# Altium PCB BLMC-26.PcbDoc (part 1 of 2)
Units mm, origin at the board's own origin, x right, y up, seen from the top; angles counter-clockwise.
Board outline 139.57 x 72.14 mm, 4 copper layers (Top Layer, GND, POWER, Bottom Layer), stack 0.603 mm thick; 168 components, 104 nets, 514 pads, 115 vias.
Unrouted connection lines stored in the file: 49.
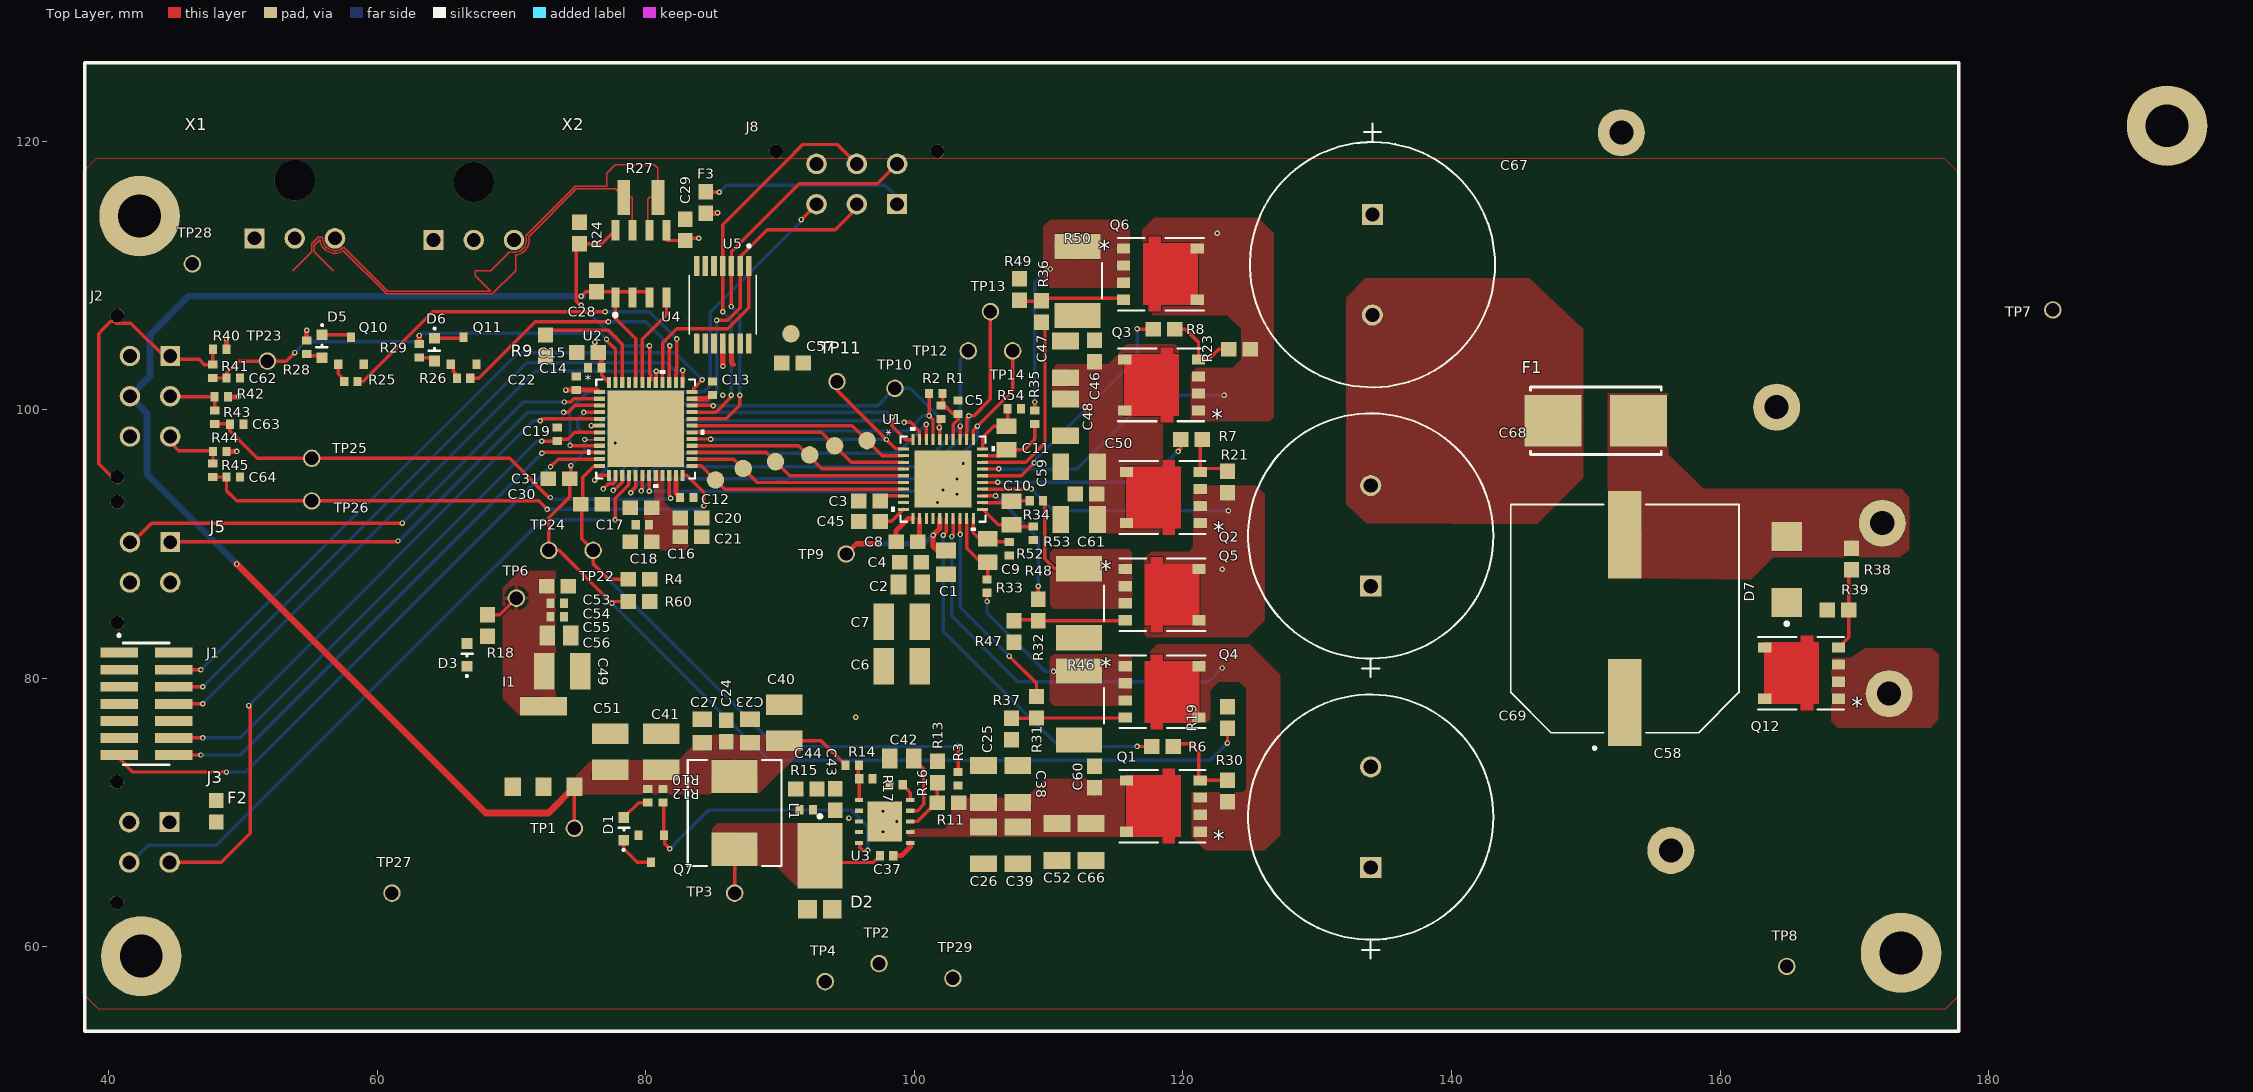
[diagram p0: Top Layer view]
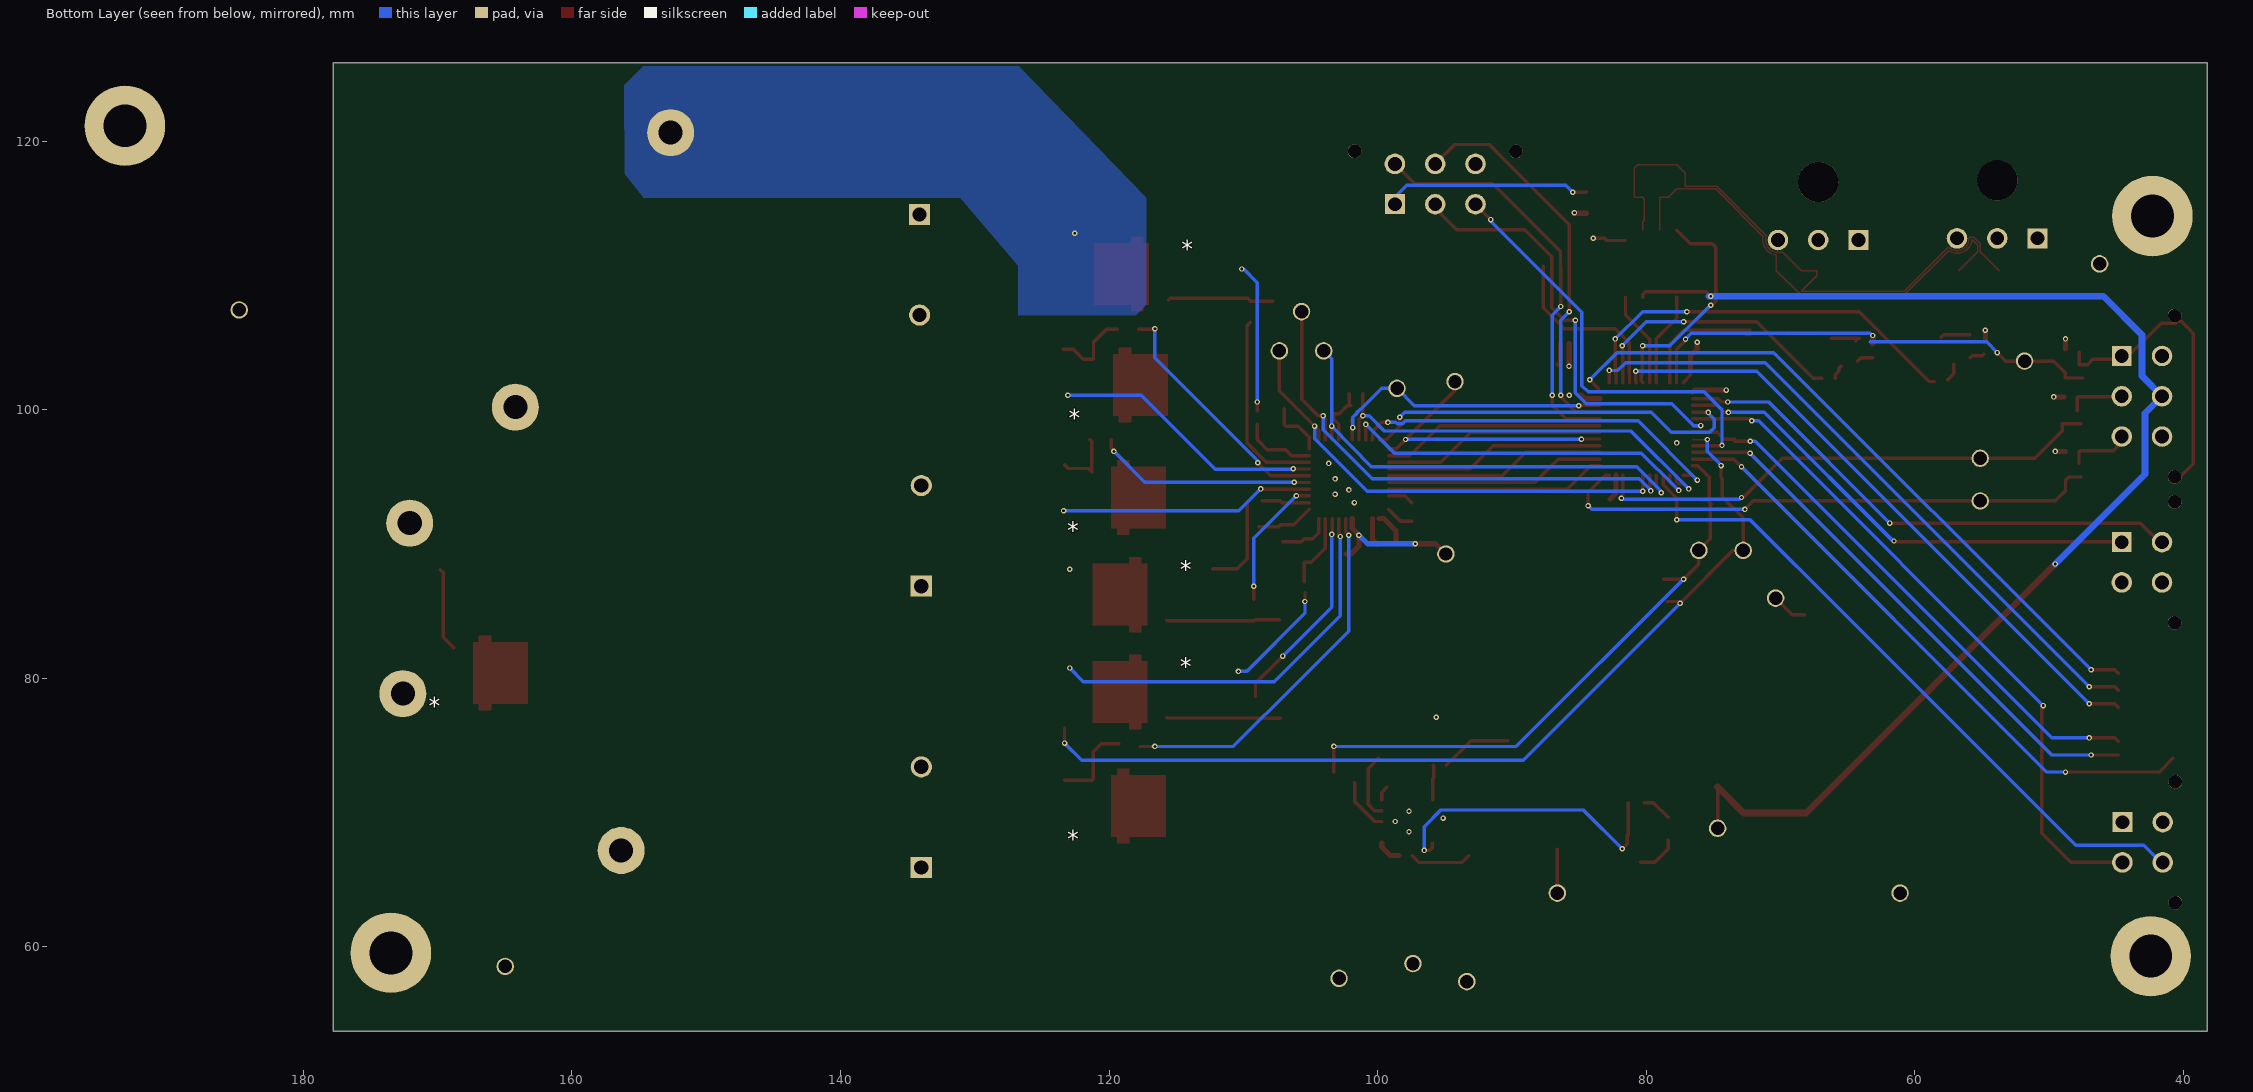
[diagram p1: Bottom Layer view, seen from below]
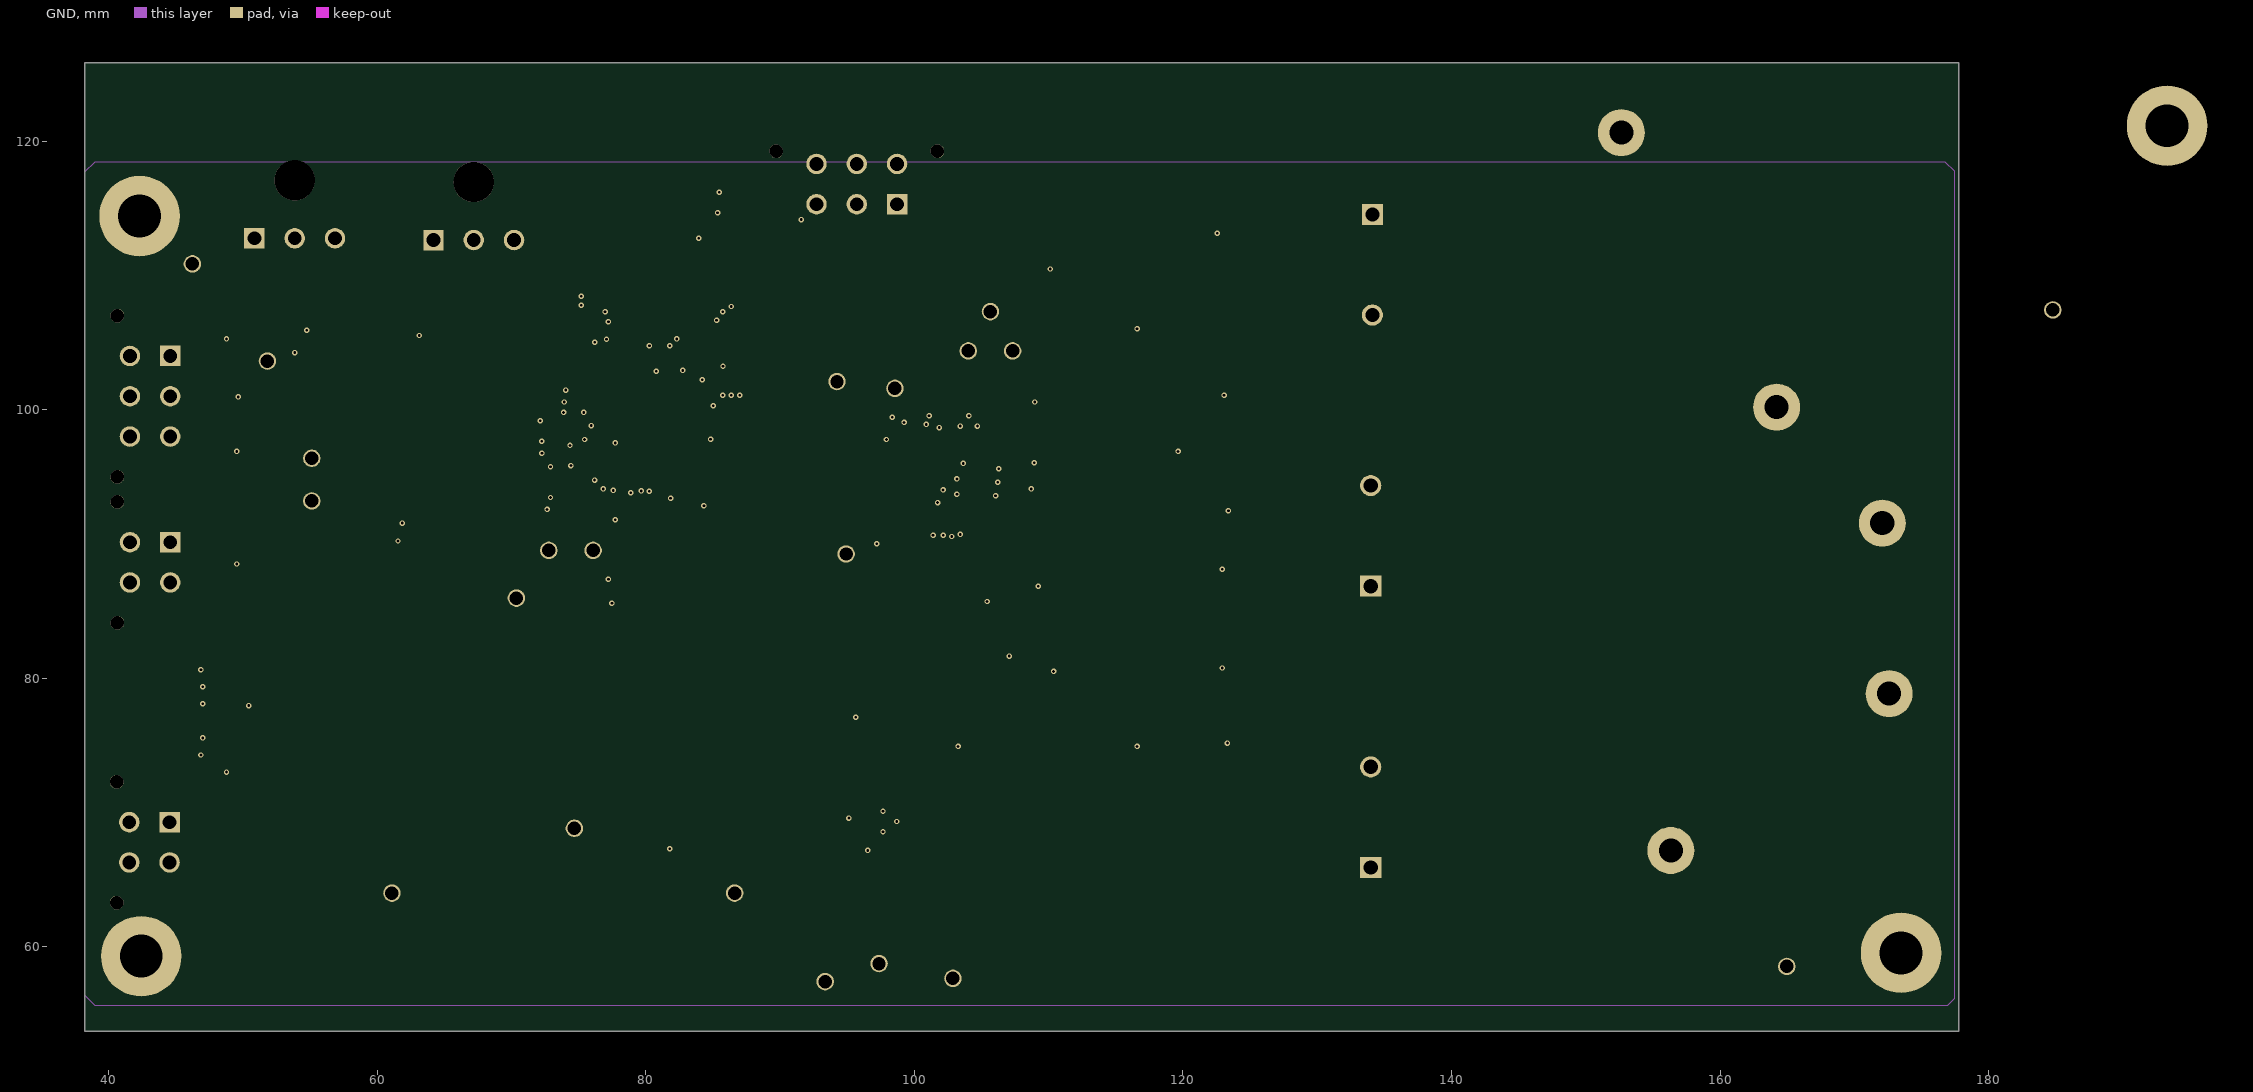
[diagram p2: GND]
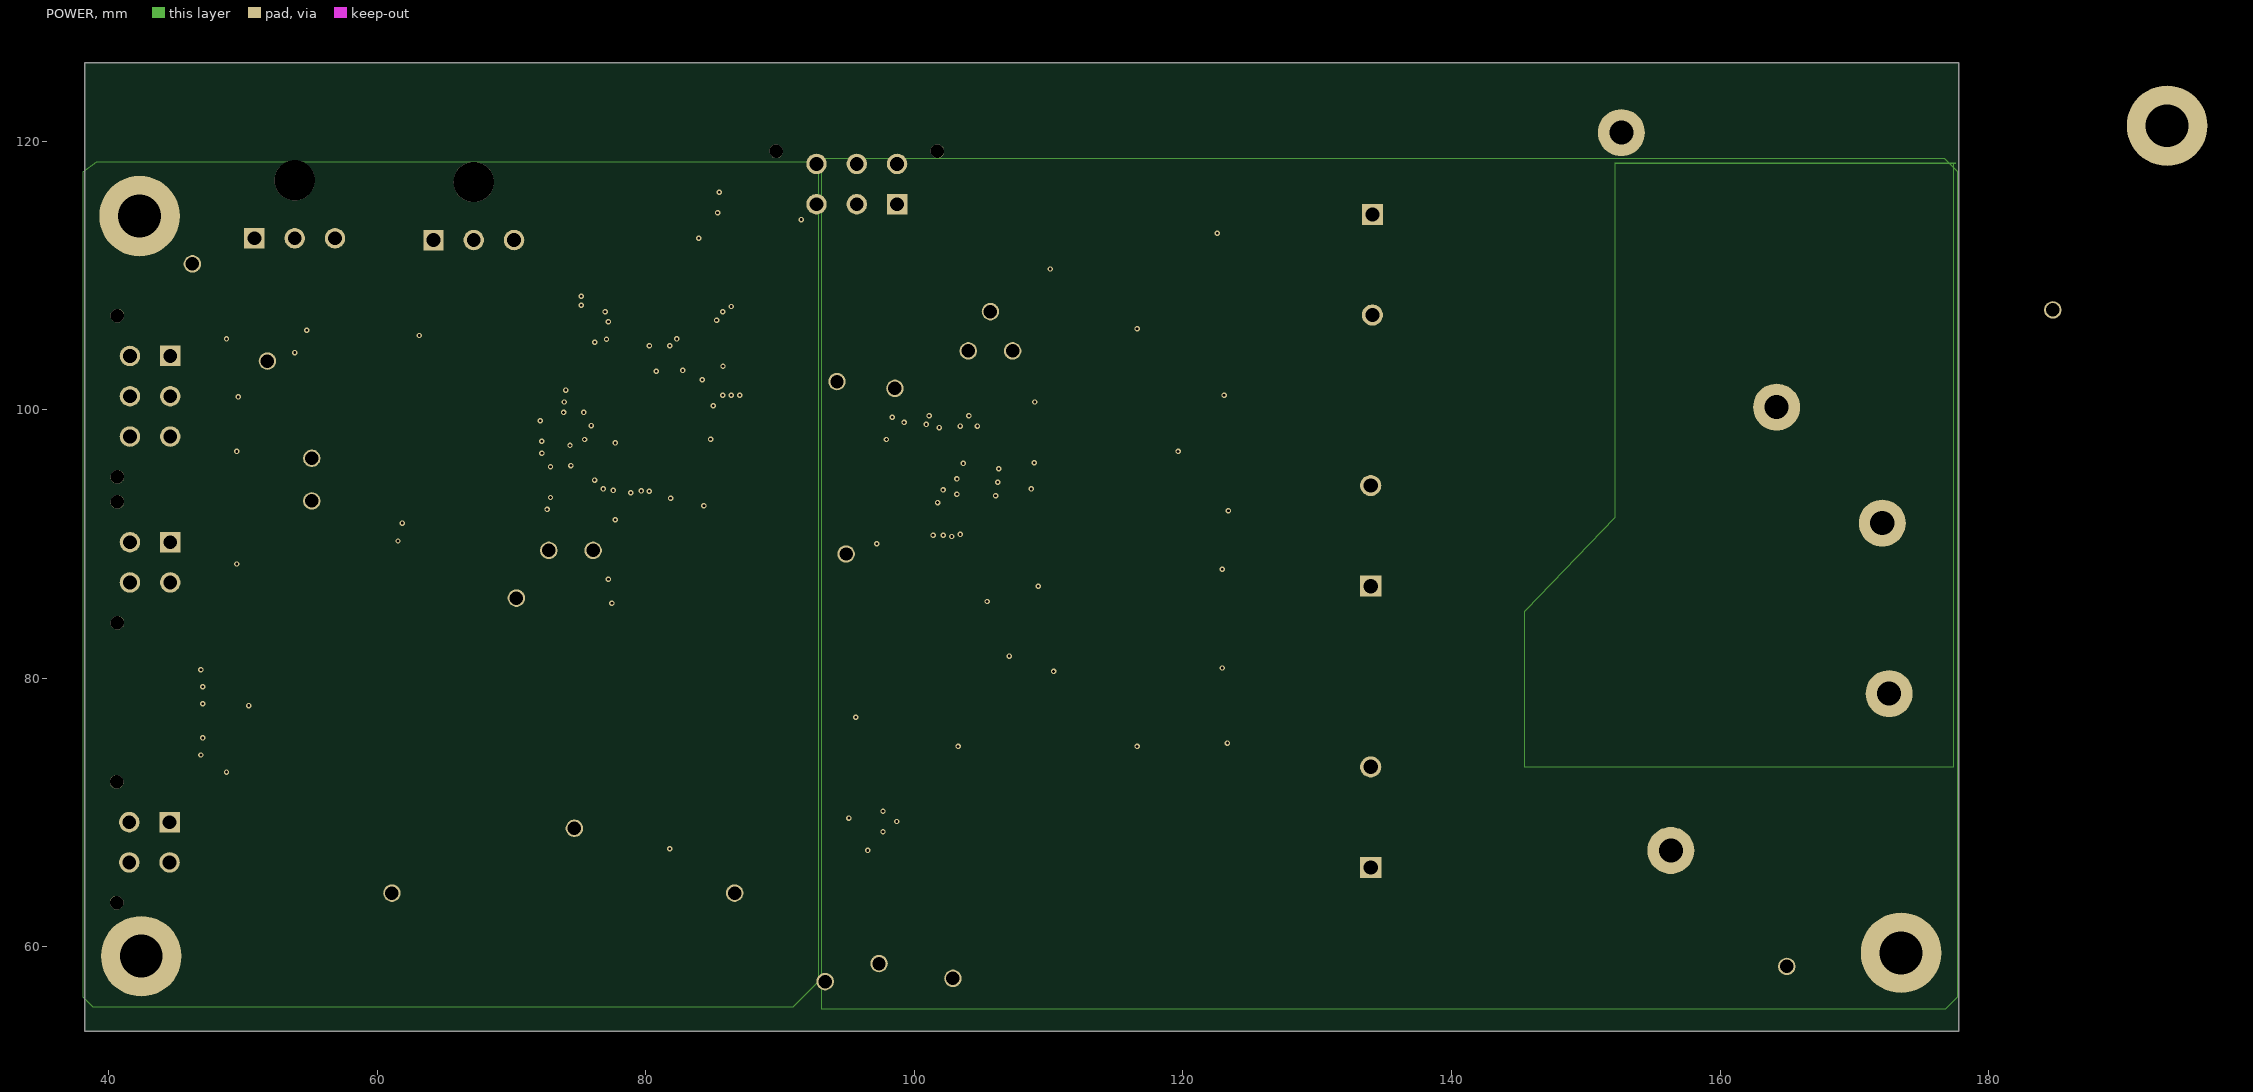
[diagram p3: POWER]

## Layer stack, top to bottom
Top Solder: solder mask 0.0102, Solder Resist, Dk 3.5
Top Layer: signal copper 0.0356
Dielectric 1: prepreg 0.0711, PP-006, Dk 4.1
GND: signal copper 0.035
Dielectric 2: dielectric 0.32, FR-4, Dk 4.8
POWER: signal copper 0.035
Dielectric 3: prepreg 0.0711, PP-006, Dk 4.1
Bottom Layer: signal copper 0.0356
Bottom Solder: solder mask 0.0102, Solder Resist, Dk 3.5

## Board outline
38.204,53.721 38.204,125.857 177.777,125.857 177.777,53.721

## Design rules (kind name [scope] priority, off if disabled: settings)
BoardOutlineClearance [All] p1: gap=0.2 ignorepadtopadclearanceinfootprint=FALSE
Clearance "Stitching GND" [IsStitchingVia and InNet('GND') vs (IsVia and (Not IsStitchingVia)) Or IsPad] p1: gap=0.127 ignorepadtopadclearanceinfootprint=FALSE
Clearance [All] p2: gap=0.102 ignorepadtopadclearanceinfootprint=FALSE except(0.127: Arc-Via Track-Via SMDPad-Via THPad-Via Via-Via Via-Fill Via-Poly Via-Region Via-Text; 0.25: Arc-Hole Track-Hole SMDPad-Hole THPad-Hole Via-Hole Fill-Hole Poly-Hole Region-Hole Text-Hole)
ComponentClearance [All] p1: gap=0.102 collisioncheckmode=3 verticalgap=0.102 showdistances=TRUE
DiffPairsRouting [All] p1: maxlimit=0.102 minlimit=0.102 mostfreqgap=0.102 toplayer_minwidth=0.102 toplayer_maxwidth=1816.048 toplayer_prefwidth=0.102 midlayer1_minwidth=0.102 midlayer1_maxwidth=1816.048 midlayer1_prefwidth=0.102 midlayer2_minwidth=0.102 midlayer2_maxwidth=1816.048 midlayer2_prefwidth=0.102 bottomlayer_minwidth=0.102 bottomlayer_maxwidth=1816.048 bottomlayer_prefwidth=0.102 maxuncoupledlength=12.7
DiffPairsRouting USB [OnLayer('Top Layer') And InDifferentialPairClass('USB')] p2: maxlimit=0.127 minlimit=0.127 mostfreqgap=0.127 toplayer_maxgap=0.127 toplayer_prefgap=0.127 toplayer_minwidth=0.237 toplayer_maxwidth=0.237 toplayer_prefwidth=0.237 midlayer1_mingap=0.127 midlayer1_minwidth=0.089 midlayer1_maxwidth=0.089 midlayer1_prefwidth=0.089 midlayer2_mingap=0.127 midlayer2_minwidth=0.089 midlayer2_maxwidth=0.089 midlayer2_prefwidth=0.089 bottomlayer_maxgap=0.127 bottomlayer_prefgap=0.127 bottomlayer_minwidth=0.237 bottomlayer_maxwidth=0.237 bottomlayer_prefwidth=0.237 impedanceprofiledriven=TRUE impedanceprofileid={C8994B27-2D6B-4B4B-A1C4-DCAF0529D0FB} maxuncoupledlength=12.7
Height [All] p1: minheight=0 maxheight=1816.048 prefheight=12.7
HoleSize [All] p1: absolutevalues=TRUE maxlimit=6.3 minlimit=0.2 maxpercent=80.000 minpercent=20.000
HoleToHoleClearance [All] p1: gap=0.25 allowstackedmicrovias=FALSE
MinimumAnnularRing [All] p1: minimumring=0.076
MinimumSolderMaskSliver [All] p1: minsoldermaskwidth=0
PlaneClearance [All] p1: clearance=0.102
PlaneConnect PlaneConnectPowerPads [InPadClass('PowerPads')] p1: planeconnectstyle=Direct reliefexpansion=0.508 reliefentries=4 reliefconductorwidth=0.254 reliefairgap=0.254
PlaneConnect [All] p2: planeconnectstyle=Direct reliefexpansion=0.3 reliefentries=4 reliefconductorwidth=0.102 reliefairgap=0.102
PolygonConnect PolygonConnectPowerPads [All vs (InPadClass('PowerPads'))] p1: connectstyle=Direct reliefconductorwidth=0.254 reliefentries=4 polygonreliefangle="90 Angle" airgapwidth=0.254
PolygonConnect [InNet('MOTOR_C')] p2: connectstyle=Direct reliefconductorwidth=0.102 reliefentries=4 polygonreliefangle="90 Angle" airgapwidth=0.102
RoutingVias [All] p1: holewidth=0.305 width=0.605 viastyle="Through Hole" minholewidth=0.3 minwidth=0.6 maxholewidth=0.405 maxwidth=0.705
SilkToSilkClearance [All] p1: silktosilkclearance=0
SilkToSolderMaskClearance [IsPad] p1: minsilkscreentomaskgap=0.102 clearancetoexposedcopper=TRUE
SolderMaskExpansion [All] p1: expansion=0.075 istentingtop=FALSE
SupplyNets "Schematic Supply Nets_3" [InNet('GND')] p1: voltage=0.000
Width [All] p1: maxlimit=0.508 minlimit=0.102 preferedwidth=0.254 minimp=50.000000 maximp=50.000000 favimp=50.000000
20 further rules are at their usual default settings.

## Classes and differential pairs
component class Driver: C1 C2 C3 C4 C5 C6 C7 C8 C45 C46 C47 C48 C50 C52 C59 C60 C61 C66 R1 R2 TP9 TP10 TP11 TP12 TP13 TP14 U1
component class MCU: C12 C13 C14 C15 C16 C17 C18 C19 C20 C21 C22 J1 R9 TP22 TP23 TP24 TP25 TP26 U2
component class LDOs: C49 C51 C53 C54 C55 C56 D3 I1 R18 TP6 TP7 TP8 TP27 TP28 TP29
component class Encoder: C57 U5
component class FETs: 2 C9 C10 C11 C31 C67 C68 C69 Q1 Q2 Q3 Q4 Q5 Q6 R6 R7 R8 R19 R21 R23 R30 R31 R32 R33 R34 R35 R36 R37 R46 R47 R48 R49 R50 R52 R53 R54 R60
component class Connectors: C30 C58 C62 C63 C64 D7 F2 F3 J2 J3 J5 J8 Q12 R3 R4 R38 R39 R40 R41 R42 R43 R44 R45
component class CAN: C28 C29 D5 D6 Q10 Q11 R25 R26 R27 R28 R29 U4 X1 X2
component class 5V_Buck: C23 C24 C25 C26 C27 C37 C38 C39 C40 C41 C42 C43 C44 D1 D2 F1 L1 Q7 R10 R11 R12 R13 R14 R15 R16 R17 TP1 TP2 TP3 TP4 U3
differential pair CAN: +CAN_P -CAN_N

## Components (designator, comment, footprint, x,y, rotation, side; value= is the part's Value field where it differs from the comment)
C1 "08051C105K4Z2A" CAP-0805 102.362,88.646 r270 top
C2 "08051C105K4Z2A" CAP-0805 99.695,86.995 r180 top
C3 "CC0603KRX7R7BB105" CAP-0603 96.647,93.218 r0 top
C4 "GRM188R72A104KA35D" CAP-0603 99.695,88.646 r180 top
C5 "CC0402KRX7R7BB104" CAP-0402 103.251,100.203 r270 top
C6 "GRM32EC72A106KE05L" CAP-1210 99.06,80.899 r180 top
C7 "GRM32EC72A106KE05L" CAP-1210 99.06,84.201 r180 top
C8 "C0603C473K1RACTU" CAP-0603 99.441,90.17 r180 top
C9 "GRM2165C1H272JA01D" CAP-0805 105.455,89.528 r90 top
C10 "GRM2165C1H272JA01D" CAP-0805 107.233,92.313 r270 top
C11 "GRM2165C1H272JA01D" CAP-0805 106.852,97.91 r90 top
C12 "CC0402KRX7R7BB104" CAP-0402 83.058,93.472 r180 top
C13 "CC0402KRX7R7BB104" CAP-0402 84.963,101.6 r270 top
C14 "CC0402KRX7R7BB104" CAP-0402 76.2,103.124 r0 top
C15 "CC0603KRX5R8BB475" CAP-0603 75.654,104.267 r0 top
C16 "CC0603KPX7R9BB103" CAP-0603 79.629,92.71 r0 top
C17 "CC0402KRX7R7BB104" CAP-0402 79.748,91.44 r0 top
C18 "CC0603KRX7R7BB105" CAP-0603 79.629,90.17 r0 top
C19 "CC0402KRX7R7BB104" CAP-0402 73.406,98.171 r270 top
C20 "CC0603KPX7R9BB103" CAP-0603 83.35,91.948 r180 top
C21 "CC0603KRX7R7BB105" CAP-0603 83.35,90.551 r180 top
C22 "CC0402KRX7R7BB104" CAP-0402 74.803,101.981 r270 top
C23 "08051C105K4Z2A" CAP-0805 87.757,76.073 r90 top
C24 "GRM188R72A104KA35D" CAP-0603 85.979,76.073 r90 top
C25 "CC1206KKX7R0BB225" CAP-1206 105.156,72.136 r90 top
C26 "CC1206KKX7R0BB225" CAP-1206 105.156,67.564 r270 top
C27 "08051C105K4Z2A" CAP-0805 84.201,76.073 r90 top
C28 "GRM188R72A104KA35D" CAP-0603 76.327,109.601 r90 top
C29 "GRM188R72A104KA35D" CAP-0603 82.931,113.411 r90 top
C30 "GRM188R72A104KA35D" CAP-0603 75.946,92.964 r0 top
C31 "GRM188R72A104KA35D" CAP-0603 73.533,94.869 r180 top
C37 "CC0402KRX7R7BB104" CAP-0402 97.925,66.802 r180 top
C38 "CC1206KKX7R0BB225" CAP-1206 107.696,72.136 r270 top
C39 "CC1206KKX7R0BB225" CAP-1206 107.696,67.564 r90 top
C40 "GRM32ER61C476KE15L" CAP-1210 90.297,76.708 r90 top
C41 "GRM32ER61C476KE15L" CAP-1210 81.153,74.549 r90 top
C42 "GRM2165C1H272JA01D" CAP-0805 99.06,74.041 r0 top
C43 "CC0603CRNPO0BN6R8" CAP-0603 94.107,70.993 r270 top
C44 "GRM1885C1H302JA01D" CAP-0603 91.948,71.755 r0 top
C45 "UMK107AB7105KA-T" CAP-0603 96.647,91.694 r180 top
C46 "GRM188R72A104KA35D" CAP-0603 113.411,104.394 r90 top
C47 "CC1206KKX7R0BB225" CAP-1206 111.252,103.759 r90 top
C48 "CC1206KKX7R0BB225" CAP-1206 111.252,99.441 r270 top
C49 "293D106X9016A2TE3" CAP-1210 73.787,80.518 r180 top
C50 "CC1206KKX7R0BB225" CAP-1206 112.268,95.758 r180 top
C51 "CL32B106KBJNNNE" CAP-1210 77.343,74.549 r90 top
C52 "CC1206KKX7R0BB225" CAP-1206 110.617,67.818 r270 top
C53 "CC0603KRX5R6BB106" CAP-0603 73.406,86.868 r180 top
C54 "CC0402KRX7R7BB104" CAP-0402 73.406,85.598 r180 top
C55 "CC0402KRX7R7BB104" CAP-0402 73.414,84.582 r180 top
C56 "CC0805JRNPO9BN471" CAP-0805 73.533,83.185 r180 top
C57 "CC0603KRX7R7BB105" CAP-0603 90.921,103.489 r180 top
C58 "EEETK2A101AM" CAP-100U-0001 152.908,84.455 r90 top
C59 "GRM188R72A104KA35D" CAP-0603 112.776,93.726 r180 top
C60 "GRM188R72A104KA35D" CAP-0603 113.411,72.644 r90 top
C61 "CC1206KKX7R0BB225" CAP-1206 112.268,91.821 r180 top
C62 "CC0402JRX7R9BB392" CAP-0402 49.276,102.37 r0 top
C63 "CC0402JRX7R9BB392" CAP-0402 49.53,98.933 r0 top
C64 "CC0402JRX7R9BB392" CAP-0402 49.276,94.996 r0 top
C66 "CC1206KKX7R0BB225" CAP-1206 113.157,67.818 r270 top
C67 "ESH477M100AM2AA" CAP-470U-0001 134.112,114.554 r270 top
C68 "ESH477M100AM2AA" CAP-470U-0001 133.985,86.868 r90 top
C69 "ESH477M100AM2AA" CAP-470U-0001 133.985,65.918 r90 top
D1 "BL-HKC36G-AV-TRB" LED-0603 79.11,67.356 r90 top
D2 "SDT8A100P5-7" DO-POWERDI5 92.964,65.659 r90 top
D3 "BL-HKC36G-AV-TRB" LED-0603 67.426,80.31 r90 top
D5 "BL-HKC36G-AV-TRB" LED-0603 55.129,106.177 r270 top
D6 "BL-HKC36G-AV-TRB" LED-0603 63.511,105.923 r270 top
D7 "SMBJ40CA" "DO-214AA (SMBJ)" 164.973,88.138 r270 top
F1 "01550900M" FUSE-0001 150.749,99.187 r180 top
F2 "0467.250NRHF" RES-0603 48.006,70.104 r270 top
F3 "0467.250NRHF" RES-0603 84.455,115.443 r90 top
I1 "LM1117IMPX-3.3/NOPB" IC-SOT-223-4 72.39,74.93 r90 top
J1 "FTSH-107-01-L-DV-K-A" SAMTEC_FTSH-107-01-L-DV-K 42.799,78.105 r270 top
J2 "Molex 43045-0612" CONN-6POS-0001 44.577,101.013 r90 top
J3 "Molex 43045-0412" CONN-4POS-0002 44.529,67.794 r90 top
J5 "Molex 43045-0412" CONN-4POS-0002 44.577,88.646 r90 top
J8 "Molex 43045-0612" CONN-6POS-0001 95.71,115.316 r0 top
L1 "IHLP2525CZER8R2M01" IND25X25CZ 86.614,69.977 r90 top
Q1 "NTMFS6H800NT1G" DFN6_5X6_SO8FL_488AA_ONS 118.49,70.485 r180 top
Q2 "NTMFS6H800NT1G" DFN6_5X6_SO8FL_488AA_ONS 118.49,93.472 r180 top
Q3 "NTMFS6H800NT1G" DFN6_5X6_SO8FL_488AA_ONS 118.363,101.854 r180 top
Q4 "NTMFS6H800NT1G" DFN6_5X6_SO8FL_488AA_ONS 118.491,78.994 r0 top
Q5 "NTMFS6H800NT1G" DFN6_5X6_SO8FL_488AA_ONS 118.491,86.233 r0 top
Q6 "NTMFS6H800NT1G" DFN6_5X6_SO8FL_488AA_ONS 118.364,110.109 r0 top
Q7 "T2N7002AK,LM" IC-SOT23-3 80.391,67.31 r180 top
Q10 "T2N7002AK,LM" IC-SOT23-3 58.039,104.394 r0 top
Q11 "T2N7002AK,LM" IC-SOT23-3 66.421,104.394 r0 top
Q12 "NTMFS6H800NT1G" DFN6_5X6_SO8FL_488AA_ONS 166.022,80.391 r180 top
R1 "RC0402FR-0710KL" RES-0402 101.6,101.219 r0 top
R2 "RC0402FR-0710KL" RES-0402 101.981,99.822 r90 top
R3 "RC0402FR-0782K5L" RES-0402 103.251,72.517 r270 top
R4 "RC0603FR-074K7L" RES-0603 79.502,87.376 r180 top
R6 "RMCF0603FT4R70" RES-0603 118.491,74.93 r180 top
R7 "RMCF0603FT4R70" RES-0603 120.65,97.79 r180 top
R8 "RMCF0603FT4R70" RES-0603 118.599,105.998 r180 top
R9 "RMCF0603ZT0R00" RES-0603 72.517,104.775 r90 top
R10 "RC0402FR-07165RL" RES-0402 80.137,71.247 r270 top
R11 "RC0603FR-072M15L" RES-0603 102.489,70.739 r0 top
R12 "RC0402FR-071KL" RES-0402 81.28,71.247 r90 top
R13 "RC0603FR-07100KL" RES-0603 101.727,73.025 r270 top
R14 "RC0402FR-0780K6L" RES-0402 95.377,73.533 r0 top
R15 "RC0402FR-0736K5L" RES-0402 91.948,70.231 r0 top
R16 "RTT021783FTH" RES-0402 98.633,72.085 r0 top
R17 "AC0402FR-0715K4L" RES-0402 96.393,72.517 r0 top
R18 "AC0603FR-10100RL" RES-0603 68.199,83.947 r270 top
R19 "NCU18XH103F60RB" RES-0603 123.317,77.089 r90 top
R21 "RC0603FR-0745K3L" RES-0603 123.317,94.615 r270 top
R23 "RC0603FR-0745K3L" RES-0603 124.206,104.521 r0 top
R24 "RC0603FR-074K7L" RES-0603 75.057,113.157 r90 top
R25 "RC0402FR-07470RL" RES-0402 58.039,102.108 r0 top
R26 "RC0402FR-07470RL" RES-0402 66.421,102.362 r0 top
R27 "RC1210FR-07120RL" RES-1210 79.629,115.824 r0 top
R28 "RC0402FR-07100RL" RES-0402 54.737,104.648 r90 top
R29 "RC0402FR-07100RL" RES-0402 63.119,104.394 r90 top
R30 "RC0603FR-0745K3L" RES-0603 123.317,71.628 r270 top
R31 "RMCF0603FT4R70" RES-0603 109.093,77.851 r90 top
R32 "RMCF0603FT4R70" RES-0603 109.22,85.09 r90 top
R33 "RC0402FR-07100RL" RES-0402 105.41,86.876 r270 top
R34 "RC0402FR-07100RL" RES-0402 109.093,93.218 r0 top
R35 "RC0402FR-07100RL" RES-0402 108.966,99.441 r90 top
R36 "RMCF0603FT4R70" RES-0603 109.474,107.315 r270 top
R37 "RC0603FR-0745K3L" RES-0603 107.233,76.239 r270 top
R38 "RC0603FR-07200KL" RES-0603 169.799,88.9 r270 top
R39 "RC0603FR-07100KL" RES-0603 168.783,85.09 r180 top
R40 "RC0402FR-072KP" RES-0402 48.26,104.521 r0 top
R41 "RC0402FR-0710KL" RES-0402 47.752,102.87 r270 top
R42 "RC0402FR-072KP" RES-0402 48.387,100.965 r0 top
R43 "RC0402FR-0710KL" RES-0402 47.879,99.441 r270 top
R44 "RC0402FR-072KP" RES-0402 48.26,96.901 r0 top
R45 "RC0402FR-0710KL" RES-0402 47.752,95.504 r270 top
R46 "CSNL2512FT2L00" STA_CSNL25122_STP 112.268,77.978 r90 top
R47 "RC0603FR-0745K3L" RES-0603 107.418,83.481 r270 top
R48 "CSNL2512FT2L00" STA_CSNL25122_STP 112.268,85.598 r90 top
R49 "RC0603FR-0745K3L" RES-0603 107.823,108.966 r90 top
R50 "CSNL2512FT2L00" STA_CSNL25122_STP 112.141,109.601 r90 top
R52 "RC0402FR-07100RL" RES-0402 107.061,89.662 r270 top
R53 "RC0402FR-07100RL" RES-0402 108.839,90.805 r270 top
R54 "RC0402FR-07100RL" RES-0402 107.442,100.076 r0 top
R60 "RC0603JR-072KL" RES-0603 79.502,85.725 r180 top
TP1 "5003" TEST-POINT-0001 74.676,68.834 r0 top
TP2 "5003" TEST-POINT-0001 97.366,58.76 r0 top
TP3 "5003" TEST-POINT-0001 86.614,64.008 r0 top
TP4 "5003" TEST-POINT-0001 93.355,57.417 r0 top
TP6 "5003" TEST-POINT-0001 70.358,85.979 r0 top
TP7 "5003" TEST-POINT-0001 184.785,107.442 r0 top
TP8 "5003" TEST-POINT-0001 164.973,58.547 r0 top
TP9 "5003" TEST-POINT-0001 94.914,89.265 r0 top
TP10 "5003" TEST-POINT-0001 98.552,101.6 r0 top
TP11 "5003" TEST-POINT-0001 94.234,102.108 r0 top
TP12 "5003" TEST-POINT-0001 104.013,104.394 r0 top
TP13 "5003" TEST-POINT-0001 105.664,107.315 r0 top
TP14 "5003" TEST-POINT-0001 107.315,104.394 r0 top
TP22 "5003" TEST-POINT-0001 76.073,89.535 r0 top
TP23 "5003" TEST-POINT-0001 51.816,103.632 r0 top
TP24 "5003" TEST-POINT-0001 72.771,89.535 r0 top
TP25 "5003" TEST-POINT-0001 55.118,96.393 r0 top
TP26 "5003" TEST-POINT-0001 55.118,93.218 r0 top
TP27 "5003" TEST-POINT-0001 61.087,64.008 r0 top
TP28 "5003" TEST-POINT-0001 46.228,110.871 r0 top
TP29 "5003" TEST-POINT-0001 102.87,57.658 r0 top
U1 "DRV8353FSRTAR" IC-GDRV-0002 102.136,94.841 r90 top
U2 "STM32G474CEU6" IC-QFPN48 79.99,98.577 r0 top
U3 "TPS54561DPRR" IC-10WSON 97.79,69.342 r180 top
U4 "TCAN1044VDRQ1" IC-8SOIC 79.629,110.871 r0 top
U5 "AS5047U-HTSM TSSOP14 LF T&RDP" SOP65P640X110-14N 85.725,107.823 r270 top
X1 "Molex 43650-0300" 43650-0300 53.848,117.094 r180 top
X2 "Molex 43650-0300" 43650-0300 67.183,116.967 r180 top

## Footprints (in the part's own frame and the unit in brackets; to place one, negate y for a bottom-side part, rotate by r counter-clockwise, add the part's x,y. Pads: shape width x height; smd on the part's side, far side on the other; paste and mask are expansions set on the pad)
43650-0300 [mm]
  round 3 hole 3 unplated: 1(0,0)
  rect 1.482x1.482 / inner rect 1.524x1.524 / far side rect 1.482x1.482 hole 1.02: P$1(3,4.32)
  round 1.53 / inner round 1.524 / far side round 1.53 hole 1.02: P$2(0,4.32) P$3(-3,4.32)
  body extent -6.32,-4.57 6.33,5.33, height 5.68
CAP-100U-0001 [mm]
  rect 6.5x2.5 smd: 1(-6.25,0) 2(6.25,0)
  silkscreen extent -9.75,-8.5 8.5,8.5, body extent -9.2,-8.5 9.2,8.5, height 16.5
CAP-0402 [mm]
  rect 0.6x0.7 smd: 1(-0.5,0) 2(0.5,0)
  body extent -0.5,-0.22 0.5,0.23, height 0.5
CAP-470U-0001 [mil]
  rect 62x62 hole 42 paste-99999 mask+0: 1(0,0)
  round 62 hole 42 paste-99999 mask+0: 2(295,0)
  silkscreen extent -267,-359 507,360, body extent -207,-354 503,354, height 1231
CAP-0603 [mm]
  rect 1.15x1.1 smd: 1(-0.8,0) 2(0.8,0)
  body extent -0.8,-0.45 0.8,0.45, height 0.8
CAP-0805 [mm]
  rect 1.16x1.47 smd: 1(-0.88,0) 2(0.88,0)
  body extent -1,-0.63 1,0.63, height 0.94
CAP-1206 [mm]
  rect 1.25x2 smd: 1(-1.375,0) 2(1.375,0)
  body extent -1.6,-0.8 1.6,0.8, height 1.5
CAP-1210 [mm]
  rect 1.53x2.72 smd: 1(-1.341,0) 2(1.341,0)
  body extent -1.6,-1.25 1.6,1.25, height 2.7
CONN-4POS-0002 [mm]
  round 1.02 hole 1.02 unplated: 1(-4.5,3.94) 1(4.5,3.94)
  rect 1.482x1.482 / inner rect 1.524x1.524 / far side rect 1.482x1.482 hole 1.02: 1(1.5,0)
  round 1.53 / inner round 1.524 / far side round 1.53 hole 1.02: 2(-1.5,0) 3(1.5,3) 4(-1.5,3)
  body extent -5.07,-2.45 5.08,6.32, height 10.03
CONN-6POS-0001 [mm]
  round 1.02 hole 1.02 unplated: 1(-6,3.94) 1(6,3.94)
  rect 1.482x1.482 / inner rect 1.524x1.524 / far side rect 1.482x1.482 hole 1.02: 1(3,0)
  round 1.53 / inner round 1.524 / far side round 1.53 hole 1.02: 2(0,0) 3(-3,0) 4(3,3) 5(0,3) 6(-3,3)
  body extent -6.57,-2.45 6.58,6.32, height 10.03
DFN6_5X6_SO8FL_488AA_ONS [mil]
  rect 39x30 smd paste-15 mask+0: 1(-110.04,75) 2(-110.04,25) 3(-110.04,-25) 4(-110.04,-75) 5(106.3,-75) 6(106.3,75)
  Top Layer region: -35.63,90 -52.36,90 -52.36,-90 -35.63,-90 -35.63,-109.49 0,-109.49 0,-90 107.28,-90 107.28,90 0,90 0,109.49 -35.63,109.49
  silkscreen extent -126,-107 126,107, body extent -124,-106 124,103, height 43
"DO-214AA (SMBJ)" [mm]
  rect 2.16x2.26 smd: 1(-2.416,0) 2(2.484,0)
  silkscreen extent 3.94,-0.12 4.19,0.13, body extent -2.72,-1.95 2.78,1.95, height 2.45
DO-POWERDI5 [mm] "SMD, 3-Leads, Body 3.975x5.375mm, Pitch 1.84mm"
  rect 1.4x1.39 smd: 1(-2.856,-0.92) 1(-2.856,0.92)
  rect 4.86x3.36 smd: 2(1.126,0)
  silkscreen extent 3.94,-0.13 4.19,0.12, body extent -3.25,-1.98 3.25,1.98, height 1.15
FUSE-0001 [mil]
  rect 167x150 smd paste+0 mask+0: 1(-125.5,0) 2(125.5,0)
  silkscreen extent -192,-99 192,99, body extent -213,-103 213,103, height 10
IC-8SOIC [mm]
  rect 0.6x1.5 smd: 1(-1.905,-2.5) 2(-0.635,-2.5) 3(0.635,-2.5) 4(1.905,-2.5) 5(1.905,2.5) 6(0.635,2.5) 7(-0.635,2.5) 8(-1.905,2.5)
  silkscreen extent -2.03,-3.93 -1.78,-3.69, body extent -2.45,-3 2.45,3, height 1.75
IC-10WSON [mm]
  rect 0.6x0.3 smd: 1(-1.9,1.6) 2(-1.9,0.8) 3(-1.9,0) 4(-1.9,-0.8) 5(-1.9,-1.6) 6(1.9,-1.6) 7(1.9,-0.8) 8(1.9,0) 9(1.9,0.8) 10(1.9,1.6)
  rect 2.6x3 smd: 11(0,0)
  body extent -2,-2 2,2, height 0.8
IC-GDRV-0002 [mil]
  rect 32x9 smd paste+0 mask+0: 1(-116,88.61) 2(-116,68.91) 3(-116,49.22) 4(-116,29.54) 5(-116,9.85) 6(-116,-9.84) 7(-116,-29.53) 8(-116,-49.22) 9(-116,-68.91) 10(-116,-88.61) 21(116,-88.61) 22(116,-68.91) 23(116,-49.22) 24(116,-29.53) 25(116,-9.84) 26(116,9.85) 27(116,29.54) 28(116,49.22) 29(116,68.91) 30(116,88.61)
  rect 9x32 smd paste+0 mask+0: 11(-88.61,-116) 12(-68.91,-116) 13(-49.22,-116) 14(-29.53,-116) 15(-9.84,-116) 16(9.85,-116) 17(29.54,-116) 18(49.22,-116) 19(68.91,-116) 20(88.61,-116) 31(88.61,116) 32(68.91,116) 33(49.22,116) 34(29.54,116) 35(9.85,116) 36(-9.84,116) 37(-29.53,116) 38(-49.22,116) 39(-68.91,116) 40(-88.61,116)
  rect 167x167 smd paste-83.5 mask+0: 41(0,0)
  silkscreen extent -152,-152 152,152, body extent -120,-120 120,120, height 65
IC-QFPN48 [mil]
  rect 32x12 smd paste+0 mask+0: 1(-136,108.27) 2(-136,88.58) 3(-136,68.9) 4(-136,49.21) 5(-136,29.53) 6(-136,9.84) 7(-136,-9.84) 8(-136,-29.53) 9(-136,-49.21) 10(-136,-68.9) 11(-136,-88.58) 12(-136,-108.27) 25(136,-108.27) 26(136,-88.58) 27(136,-68.9) 28(136,-49.21) 29(136,-29.53) 30(136,-9.84) 31(136,9.84) 32(136,29.53) 33(136,49.21) 34(136,68.9) 35(136,88.58) 36(136,108.27)
  rect 12x32 smd paste+0 mask+0: 13(-108.27,-136) 14(-88.58,-136) 15(-68.9,-136) 16(-49.21,-136) 17(-29.53,-136) 18(-9.84,-136) 19(9.84,-136) 20(29.53,-136) 21(49.21,-136) 22(68.9,-136) 23(88.58,-136) 24(108.27,-136) 37(108.27,136) 38(88.58,136) 39(68.9,136) 40(49.21,136) 41(29.53,136) 42(9.84,136) 43(-9.84,136) 44(-29.53,136) 45(-49.21,136) 46(-68.9,136) 47(-88.58,136) 48(-108.27,136)
  rect 224x224 smd paste-112 mask+0: 49(0,0)
  silkscreen extent -172,-172 172,172, body extent -140,-140 140,140, height 24
IC-SOT23-3 [mm]
  rect 0.6x0.7 smd: 1(-0.95,-1) 2(0.95,-1) 3(0,1)
  body extent -1.46,-1.18 1.46,1.19, height 1.12
IC-SOT-223-4 [mm]
  rect 1.4x1.2 smd mask+0.07: 1(-3,2.3) 3(-3,-2.3) 4(-3,0)
  rect 1.4x3.5 smd: 2(3,0)
  body extent -3.5,-3.25 3.5,3.25, height 1.68
IND25X25CZ [mil]
  rect 98x135 smd paste-67.5 mask-67.5: 1(-107,0) 2(107,0)
  silkscreen extent -155,-138 155,138, body extent -150,-133 150,133, height 118
LED-0603 [mm]
  rect 0.8x0.8 smd: 1(2.291,0.751) 2(0.589,0.751)
  silkscreen extent -0.2,0.34 1.52,1.13, body extent 0.65,0.36 2.25,1.16, height 0.39
RES-0402 [mm]
  rect 0.6x0.7 smd: 1(-0.5,0) 2(0.5,0)
  body extent -0.5,-0.25 0.5,0.25, height 0.3
RES-0603 [mm]
  rect 1.15x1.1 smd: 1(-0.8,0) 2(0.8,0)
  body extent -0.8,-0.4 0.8,0.4, height 0.43
RES-1210 [mm] "Chip Resistor, 2-Leads, Body 3.10x2.60mm, IPC High Density"
  rect 0.95x2.6 smd: 1(-1.275,0) 2(1.275,0)
  body extent -1.6,-1.35 1.6,1.35, height 0.6
SAMTEC_FTSH-107-01-L-DV-K [mm]
  rect 0.74x2.79 smd: 01(-3.81,-2.035) 02(-3.81,2.035) 03(-2.54,-2.035) 04(-2.54,2.035) 05(-1.27,-2.035) 06(-1.27,2.035) 07(0,-2.035) 08(0,2.035) 09(1.27,-2.035) 10(1.27,2.035) 11(2.54,-2.035) 12(2.54,2.035) 13(3.81,-2.035) 14(3.81,2.035)
  silkscreen extent -5.19,-2.13 4.53,1.72, body extent -4.45,-2.82 4.45,3.02, height 5.96
SOP65P640X110-14N [mm]
  rrect25% 1.5x0.41 smd paste+0 mask+0.102: 1(-2.885,1.95) 2(-2.885,1.3) 3(-2.885,0.65) 4(-2.885,0) 5(-2.885,-0.65) 6(-2.885,-1.3) 7(-2.885,-1.95) 8(2.885,-1.95) 9(2.885,-1.3) 10(2.885,-0.65) 11(2.885,0) 12(2.885,0.65) 13(2.885,1.3) 14(2.885,1.95)
  silkscreen extent -4.48,-2.5 2.2,2.5, body extent -3.25,-2.56 3.15,2.55, height 1.2
STA_CSNL25122_STP [mil]
  rect 74x135 smd paste+0 mask+0: 1(-101,0) 2(101,0)
  silkscreen extent -52,-72 52,-72, body extent -130,-67 130,68, height 22
TEST-POINT-0001 [mm] "2024 miniature test point"
  round 1.3 hole 1: 1(0,0)
  body extent -1.27,-1.27 1.27,1.27, height 4.57

## Part data
C1 C2 C23 C27: library part CAP-1U-0001, "CAP CER 1UF 50V X7R 0805", Capacitance="1.0 uF", Voltage="100 V", ComponentLink2Description=Datasheet, ComponentLink2URL=https://www.yageo.com/upload/media/product/productsearch/datasheet/mlcc/UPY-GPHC_X7R_6.3V-to-250V_24.pdf, Device Class=Ceramic, Size=0805
C3 C18 C21 C57: library part CAP-1U-0002, "CAP CER 1UF 16V X7R 0603", Capacitance="1.0 uF", Voltage=16V, Device Class=Ceramic, Size=0603
C4 C24 C28 C29 C30 C31 C46 C59 C60: library part CAP-1U-0002, "CAP CER 100NF 100V X7R 0603", Capacitance="100 nF", Voltage=100V, Device Class=Ceramic, Size=0603
C5 C12 C13 C14 C17 C19 C22 C37 C54 C55: library part CAP-0.1U-0001, "CAP CER 0.1UF 16V X7R 0402", Capacitance="100 nF", Voltage Rating="16 V", ComponentLink2Description=Datasheet, ComponentLink2URL=https://www.yageo.com/upload/media/product/productsearch/datasheet/mlcc/UPY-GPHC_X7R_6.3V-to-250V_24.pdf, Device Class=Ceramic, Size=0402
C6 C7: library part CAP-10U-0003, "10 µF ±10% 100V Ceramic Capacitor X7S 1210 (3225 Metric)", Package Size=1210, Voltage Rating=100V, Capcitance="10 uF"
C8: library part CAP-4.7U-0001, "CAP CER 47NF 100V X5R 0603", Capacitance="47 nF", Voltage=100V, Device Class=Ceramic, Size=0603
C9 C10 C11 C42: library part CAP-2.7N-0001, "CAP CER 2700PF 50V C0G/NP0 0805", Capacitance=2.7nF, Voltage=50V, ComponentLink1Description=Datasheet, ComponentLink1URL=https://search.murata.co.jp/Ceramy/image/img/A01X/G101/ENG/GRM2165C1H272JA01-01.pdf, Device Class=Ceramic, Size=0805
C15: library part CAP-4.7U-0001, "CAP CER 4.7UF 25V X5R 0603", Capacitance="4.7 uF", Voltage=25V, Device Class=Ceramic, Size=0603
C16 C20: library part CAP-10N-0002, "CAP CER 10000PF 50V X7R 0603", Capacitance="10 nF", Voltage="50 V", ComponentLink2Description=Datasheet, ComponentLink2URL=http://www.yageo.com/documents/recent/UPY-GPHC_X7R_6.3V-to-50V_18.pdf, Device Class=Ceramic, Size=0603
C25 C26 C38 C39 C47 C48 C50 C52 C61 C66: library part CAP-2.2U-0001, "CAP CER 2.2UF 100V X7R 1206", Capacitance=2.2uF, Voltage=100V, ComponentLink1Description=Datasheet, ComponentLink1URL=https://www.yageo.com/upload/media/product/productsearch/datasheet/mlcc/UPY-GPHC_X7R_6.3V-to-250V_24.pdf, Device Class=Ceramic, Size=1206
C40 C41: library part CAP-47U-0002, "CAP CER 47UF 16V X5R 1210", Capacitance="47 uF", Voltage=16V, ComponentLink1Description=Datasheet, ComponentLink1URL=https://search.murata.co.jp/Ceramy/image/img/A01X/G101/ENG/GRM32ER61C476KE15-01.pdf, Device Class=Ceramic, Size=1210
C43: library part CAP-6.8P-0001, "CAP CER 6.8PF 100V C0G/NPO 0603", Capacitance=6.8pF, Voltage=100V, ComponentLink1Description=Datasheet, ComponentLink1URL=https://www.yageo.com/upload/media/product/productsearch/datasheet/mlcc/UPY-GPHC_X7R_6.3V-to-250V_24.pdf, Device Class=Ceramic, Size=0603
C44: library part CAP-3N-0001, "3000 pF ±5% 50V Ceramic Capacitor C0G, NP0 0603 (1608 Metric)", Capacitance="3 nF", Voltage=50V, ComponentLink1Description=Datasheet, ComponentLink1URL=https://mm.digikey.com/Volume0/opasdata/d220001/medias/docus/41/CL32B106KBJNNNE_Spec.pdf, Device Class=Ceramic, Size=1210
C45: library part CAP-1U-0002, "1 µF ±10% 50V Ceramic Capacitor X7R 0603 (1608 Metric)", Capacitance="1 uF", Package Size=0603, Voltage=50V
C49: library part CAP-10U-0003, "CAP TANT 10UF 10% 16V 1206", Capacitance="10 uF", Voltage=16V, ComponentLink1Description=Datasheet, ComponentLink1URL=https://www.lcsc.com/datasheet/lcsc_datasheet_2304140030_Vishay-Intertech-293D106X9016A2TE3_C110038.pdf, Device Class=Tantalum, Size=1206
C51: library part CAP-10U-0002, "CAP CER 10UF 50V X7R 1210", Capacitance="10 uF", Voltage=50V, ComponentLink1Description=Datasheet, ComponentLink1URL=https://mm.digikey.com/Volume0/opasdata/d220001/medias/docus/41/CL32B106KBJNNNE_Spec.pdf, Device Class=Ceramic, Size=1210
C53: library part CAP-10U-0001, "CAP CER 10UF 10V X5R 0603", Capacitance="10 uF", Voltage=10V, ComponentLink1Description=Datasheet, ComponentLink1URL=https://www.yageo.com/upload/media/product/app/datasheet/mlcc/upy-gphc_x5r_4v-to-50v.pdf, Device Class=Ceramic, Size=0603
C56: library part CAP-470P-0001, "CAP CER 470PF 50V C0G/NPO 0805", Capacitance="470 pF", Voltage=50V, ComponentLink1Description=Datasheet, ComponentLink1URL=https://www.yageo.com/upload/media/product/productsearch/datasheet/mlcc/UPY-GP_NP0_16V-to-50V_18.pdf, Device Class=Ceramic, Size=0805
C58: library part CAP-100U-0001, "CAP ALUM 100UF 20% 100V SMD", Capacitance="100 uF", Voltage=100V, ComponentLink1Description=Datasheet, ComponentLink1URL=https://industrial.panasonic.com/cdbs/www-data/pdf/RDE0000/ABA0000C1190.pdf, Device Class=Electrolytic
C62 C63 C64: library part CAP-3.9N-0001, "3900 pF ±5% 50V Ceramic Capacitor X7R 0402 (1005 Metric)", Capacitance=3.9n, Voltage=50V
C67 C68 C69: library part CAP-470U-0001, "CAP ALUM 470UF 20% 100V RADIAL", Capacitance="470 uF", Voltage=100V, ComponentLink1Description=Datasheet, ComponentLink1URL=https://industrial.panasonic.com/cdbs/www-data/pdf/RDE0000/ABA0000C1190.pdf, Device Class=Electrolytic
D1 D3 D5 D6: library part LED-0001, "LED YELLOW CLEAR 0603 SMD", Forward Current=30mA, Forward Voltage=2V, ComponentLink1Description=Datasheet, ComponentLink1URL=https://www.americanbrightled.com/pdffiles/led-components/smt/BL-HKC36G-AV-TRB.pdf
D2: library part DIO-SCHOTTKY-0001, "DIODE SCHOTTKY 100V 8A POWERDI5", Forward Current=8A, Reverse Voltage (DC)=100V, ComponentLink1Description=Datasheet, ComponentLink1URL=https://www.diodes.com/assets/Datasheets/PDS760.pdf
D7: library part DIO-TVS-0001, "TVS DIODE 40VWM 64.5VC DO214AA", Current Rating=9.3A, Voltage Rating=64.5V, ComponentLink1Description=Datasheet, ComponentLink1URL=https://www.littelfuse.com/media?resourcetype=datasheets&itemid=09a6ae9a-73cb-4ac4-acac-e6dab92ab953&filename=littelfuse_tvs_diode_smbj_datasheet.pdf
F1: library part FUSE-0001, "FUSE BLOK CARTRIDGE 125V 10A SMD", Fuse Current=8A, Voltage Rating=125V, ComponentLink2Description=Datasheet, ComponentLink2URL=https://www.littelfuse.com/~/media/electronics/datasheets/fuses/littelfuse_fuse_154_154t_154l_154tl_datasheet.pdf.pdf
F2 F3: library part FUSE-0002, "FUSE BRD MT 250MA 32VAC 32VDC", Fuse Current=250mA, Voltage Rating=32V, ComponentLink2Description=Datasheet, ComponentLink2URL=https://www.littelfuse.com/media?resourcetype=datasheets&itemid=4a59f034-1cca-460e-a5ba-e1e66247c76d&filename=littelfuse_fuse_467_datasheet.pdf
I1: library part IC_LDO_3V3_0001, "IC REG LIN 3.3V 800MA SOT223-4", ComponentLink1Description="New link", ComponentLink1URL=https://www.ti.com/lit/ds/symlink/lm1117.pdf?HQS=dis-dk-null-digikeymode-dsf-pf-null-wwe&ts=1721700739746
J1: library part CONN-Flashing, "Connector Header Surface Mount 14 position 0.050 (1.27mm)", Package=None, Check_prices=https://www.snapeda.com/parts/FTSH-107-01-L-DV-K-A/Samtec+Inc./view-part/?ref=eda, ComponentLink1Description=Datasheet, ComponentLink1URL=https://mm.digikey.com/Volume0/opasdata/d220001/medias/docus/6209/ftsh-1xx-xx-xxx-dv-xxx-xxx-x-xx-mkt.pdf?_gl=1*1c8qhrp*_up*MQ..*_gs*MQ..&gclid=Cj0KCQjwndHEBhDVARIsAGh0g3BhbAROHH0tQxim6dYiCi7CVIKM-WvKYR8T8zWoEwepZ3CPXWTcBI4aAtXsEALw_wcB&gclsrc=aw.ds&gbraid=0AAAAADrbLlju0DZp9CUD_BKsHNp-CszV5, MF="Samtec Inc.", MP=FTSH-107-01-L-DV-K-A, SnapEDA_Link=https://www.snapeda.com/parts/FTSH-107-01-L-DV-K-A/Samtec+Inc./view-part/?ref=snap
J2 J8: library part CONN-6POS-0001, "CONN HEADER VERT 6POS 3MM", ComponentLink1Description=Datasheet, ComponentLink1URL=https://tools.molex.com/pdm_docs/ps/PS-43045.pdf
J3 J5: library part CONN-4POS-0002, "CONN HEADER VERT 4POS 3MM", ComponentLink1Description=Datasheet, ComponentLink1URL=https://www.molex.com/content/dam/molex/molex-dot-com/products/automated/en-us/salesdrawingpdf/430/43045/430450412_sd.pdf?inline
L1: library part IND-8.2U-0001, "8.2 µH Shielded Molded Inductor 4 A 68mOhm Max Nonstandard", Current Rating=7.5A, Inductance=8.2uH, ComponentLink1Description=Datasheet, ComponentLink1URL=https://products.sumida.com/products/pdf/CDRH104.pdf
Q1 Q2 Q3 Q4 Q5 Q6 Q12: "N-Channel 80 V 28A (Ta), 203A (Tc) 3.8W (Ta), 200W (Tc) Surface Mount 5-DFN (5x6) (8-SOFL)", Drain Current=100A, Manufacturer_Part_Number=TPH2R506PL, RefDes=RefDes, Vdss=80V, Vgs="4V @ 1mA", Vgs (max)=20V
Q7 Q10 Q11: library part NMOS-200MA-0001, "MOSFET N-CH 60V 200MA SOT23", Continuous Current=200mA, Voltage=60V, ComponentLink1Description=Datasheet, ComponentLink1URL=https://toshiba.semicon-storage.com/info/T2N7002AK_datasheet_en_20150401.pdf?did=29712&prodName=T2N7002AK
R1 R2 R41 R43 R45: library part RES-10k-0001, "RES 10K OHM 1% 1/16W 0402", Power=1/16W, Resistance=10k, Tolerance=1%, ComponentLink1Description=Datasheet, ComponentLink1URL=https://www.yageo.com/upload/media/product/products/datasheet/rchip/PYu-RC_Group_51_RoHS_L_12.pdf, Size=0402
R3: library part RES-82.5k-0001, "82.5 kOhms ±1% 0.063W, 1/16W Chip Resistor 0402 (1005 Metric) Moisture Resistant Thick Film", Power=1/16W, Resistance=82.5k, Tolerance=1%, ComponentLink1Description=Datasheet, ComponentLink1URL=https://www.lcsc.com/datasheet/lcsc_datasheet_2304140030_YAGEO-RC0603FR-0712KL_C114659.pdf, Size=0603
R4 R24: library part RES-4.7k-0001, "RES 4.7K OHM 1% 1/10W 0603", Power=1/10W, Resistance=4.7k, Tolerance=1%, ComponentLink1Description=Datasheet, ComponentLink1URL=https://www.yageo.com/upload/media/product/products/datasheet/rchip/PYu-RC_Group_51_RoHS_L_12.pdf, Size=0603
R6 R7 R8 R31 R32 R36: library part RES-4.7-0001, "4.7 Ohms ±1% 0.1W, 1/10W Chip Resistor 0603 (1608 Metric) Automotive AEC-Q200 Thick Film", Power=0.1W, Resistance=4.7R, Tolerance=1%, ComponentLink1Description=Datasheet, ComponentLink1URL=https://www.yageo.com/upload/media/product/products/datasheet/rchip/PYu-RC_Group_51_RoHS_L_12.pdf, Size=0402
R9: library part RES-0-0001, "0 Ohms Jumper 0.1W, 1/10W Chip Resistor 0603 (1608 Metric) Automotive AEC-Q200 Thick Film", Package Size=0603, Power="1/10 W", Resistance=0
R10: library part RES-165-0001, "RES 165 OHM 1% 1/16W 0402", Package=None, Availability=Unavailable, MP=RC0402FR-07165RL, Price=None
R11: library part RES-2.15M-0001, "RES SMD 2.15M OHM 1% 1/10W 0603", Power=1/10W, Resistance=2.15M, Tolerance=1%, ComponentLink1Description=Datasheet, ComponentLink1URL=https://www.yageo.com/upload/media/product/products/datasheet/rchip/PYu-RC_Group_51_RoHS_L_12.pdf, Size=0603
R12: library part RES-1k-0001, "RES 1K OHM 1% 1/16W 0402", Power=1/16W, Resistance=1k, Tolerance=1%, ComponentLink1Description=Datasheet, ComponentLink1URL=https://www.yageo.com/upload/media/product/products/datasheet/rchip/PYu-RC_Group_51_RoHS_L_12.pdf, Size=0402
R13 R39: library part RES-100k-0001, "RES SMD 100K OHM 1% 1/10W 0603", Power=100mW, Resistance=100k, Tolerance=1%, ComponentLink1Description=Datasheet, ComponentLink1URL=https://www.yageo.com/upload/media/product/products/datasheet/rchip/PYu-RC_Group_51_RoHS_L_12.pdf, Size=0603
R14: library part RES-80.6k-0001, "80.6 kOhms ±1% 0.063W, 1/16W Chip Resistor 0402 (1005 Metric) Moisture Resistant Thick Film", Power=1/16W, Resistance=80.6k, Tolerance=1%, ComponentLink1Description=Datasheet, ComponentLink1URL=https://www.yageo.com/upload/media/product/products/datasheet/rchip/PYu-RC_Group_51_RoHS_L_12.pdf, Size=0402
R15: library part RES-36.5k-0001, "36.5 kOhms ±1% 0.063W, 1/16W Chip Resistor 0402 (1005 Metric) Moisture Resistant Thick Film", Power=1/16W, Resistance=36.5k
R16: library part RES-178k-0001_1, "62.5mW Thick Film Resistors 50V ±100ppm/℃ ±1% 178kΩ 0402 Chip Resistor - Surface Mount ROHS", Power=1/16W, Resistance=178k, Tolerance=1%, ComponentLink1Description=Datasheet, ComponentLink1URL=https://www.lcsc.com/datasheet/lcsc_datasheet_2304140030_RALEC-RTT021783FTH_C102842.pdf, Size=0402
R17: library part RES-15.4K-0001, "RES 15.4kΩ ±1% 0.063W 0402", Power=1/16W, Resistance=15.4k, Tolerance=1%, ComponentLink1Description=Datasheet, ComponentLink1URL=https://www.yageo.com/upload/media/product/productsearch/datasheet/rchip/PYu-AC_51_RoHS_L_10.pdf, Size=0402
R18: library part RES-100-0002, "100 Ohms ±1% 0.1W, 1/10W Chip Resistor 0603 (1608 Metric) Automotive AEC-Q200 Thick Film", Manufacturer=YAGEO, Package Size=0603, Power Rating=1/10W, Resistance="100Ohm +/-1%", Assembled?=no, Manufacturer Part Number=AC0603FR-10100RL
R19: library part THERM-10K-0001, "NTC Thermistor 10k 0603 (1608 Metric)", Manufacturer="Texas Instruments", Manufacturer Part Number=TMP6431DECR, Package Size=0402, Resistance="10k +/- 1%"
R21 R23 R30 R37 R47 R49: library part RES-45.3K-0001, "45.3 kOhms ±1% 0.1W, 1/10W Chip Resistor 0603 (1608 Metric) Moisture Resistant Thick Film", Package Size=0603, Power="1/10 W", Resistance="45.3 kOhms", Tolerance="+/- 1%", Assembled?=no
R25 R26: library part RES-470-0001, "RES 470 OHM 1% 1/16W 0402", Power=1/16W, Resistance=470R, Tolerance=1%, ComponentLink1Description=Datasheet, ComponentLink1URL=https://www.yageo.com/upload/media/product/products/datasheet/rchip/PYu-RC_Group_51_RoHS_L_12.pdf, Size=0402
R27: library part RES-120-0001, "RES 120 OHM 1% 1/2W 1210", Power=1/2W, Resistance=120R, Tolerance=1%, ComponentLink1Description=Datasheet, ComponentLink1URL=https://www.yageo.com/upload/media/product/products/datasheet/rchip/PYu-RC_Group_51_RoHS_L_12.pdf, Size=1210
R28 R29 R33 R34 R35 R52 R53 R54: library part RES-100-0001, "RES 100 OHM 1% 1/16W 0402", Power=1/16W, Resistance=100R, Tolerance=1%, ComponentLink1Description=Datasheet, ComponentLink1URL=https://www.yageo.com/upload/media/product/products/datasheet/rchip/PYu-RC_Group_51_RoHS_L_12.pdf, Size=0402
R38: library part RES-200k-0001, "RES SMD 200K OHM 1% 1/10W 0603", Power=100mW, Resistance=200k, Tolerance=1%, ComponentLink1Description=Datasheet, ComponentLink1URL=https://www.yageo.com/upload/media/product/products/datasheet/rchip/PYu-RC_Group_51_RoHS_L_12.pdf, Size=0603
R40 R42 R44: library part RES-2K-0001, "2 kOhms ±1% 0.063W, 1/16W Chip Resistor 0402 (1005 Metric) Thick Film", Power="1/16 W", Resistance="2K +/- 1%"
R46 R48 R50: library part RES-2m-0001, "2 mOhms ±1% 3W Chip Resistor 2512 (6332 Metric) Current Sense, Moisture Resistant Metal Element", Power=3W, Resistance=2m, Tolerance=1%, ComponentLink1Description=Datasheet, ComponentLink1URL=https://www.yageo.com/upload/media/product/products/datasheet/rchip/PYu-RC_Group_51_RoHS_L_12.pdf, Size=0402
R60: library part RES-13.7K-0001, "RES 2K OHM 5% 1/10W 0603", Power=1/10W, Resistance=2k
TP1 TP2 TP3 TP4 TP6 TP7 TP8 TP9 TP10 TP11 TP12 TP13 TP14 TP22 TP23 TP24 TP25 TP26 TP27 TP28 TP29: library part TEST-POINT-0001, "Oranange PC Test Point, Miniature Phoisphor Bronze Silver Plating Through Hole Mounting Type"
U1: library part IC-GDRV-0002, "102-V MAX 3-PHASE FUNCTIONAL SAF", Manufacturer_Name="Texas Instruments", Copyright="Copyright (C) 2025 Ultra Librarian. All rights reserved.", Manufacturer_Part_Number=DRV8353FSRTAR, RefDes=RefDes, Type="Power Management", VCC-max=102V
U2: library part IC-STM32G474, "ARM® Cortex®-M4F STM32G4 Microcontroller IC 32-Bit 170MHz 512KB (512K x 8) FLASH 48-UFQFPN (7x7)", Manufacturer_Name=STMicroelectronics, Copyright="Copyright (C) 2025 Ultra Librarian. All rights reserved.", Manufacturer_Part_Number=STM32G474CEU6, RefDes=RefDes, Type=Type
U3: library part IC-BUCK-0001, "IC REG BUCK ADJ 5A 10WSON", ComponentLink1Description=Datasheet, ComponentLink1URL=https://www.ti.com/general/docs/suppproductinfo.tsp?distId=10&gotoUrl=https%3A%2F%2Fwww.ti.com%2Flit%2Fgpn%2Ftps54561
U4: library part IC-CAN-0001, "IC TRANSCEIVER 1/1 8SOIC", ComponentLink1Description=Datasheet, ComponentLink1URL=https://www.ti.com/lit/ds/symlink/tcan1044-q1.pdf?HQS=dis-dk-null-digikeymode-dsf-pf-null-wwe&ts=1728758303289&ref_url=https%253A%252F%252Fwww.ti.com%252Fgeneral%252Fdocs%252Fsuppproductinfo.tsp%253FdistId%253D10%2526gotoUrl%253Dhttps%253A%252F%252Fwww.ti.com%252Flit%252Fgpn%252Ftcan1044-q1
U5: library part IC-ABSENC-0001, "Hall Effect Sensor Rotary Position External Magnet, Not Included Gull Wing"
X1 X2: library part "Micro-Fit Molex 3 Pin Right Angle", Package=43650-0300, DeviceName=43650-0300, DeviceSetName=HEADER_POS3_?, GateName_1=G$1, LibraryName=con-molex-micro-fit-3_0_2, SymbolName_1=HEADER_POS3

## Free pads (board coordinates)
  round 3.5 hole 1.8: 2(172.593,78.867) 3(152.654,120.65) 3(156.337,67.183) 3(164.211,100.203) 3(172.085,91.567)
  round 6 hole 3.2: 4(42.291,114.427) 4(42.418,59.309) 4(173.482,59.563) 4(193.294,121.158)
  round 1.3 smd: 5(85.181,94.778) 5(87.249,95.631) 5(89.662,96.139) 5(90.805,105.664) 5(92.202,96.647) 5(94.062,97.327) 5(96.474,97.709)

## Via types
v1: diameter 0.406, hole 0.203, Top Layer to Bottom Layer, 115 vias

## Nets (pads, with @x,y where several pads share a name; then routed paths per layer and width w, separated by ;. In a path a pad name is that pad's centre, name@x,y a point inside that pad or via, vN(x,y) a via of type N, cw(c..) or ccw(c..) an arc to the next point about the centre after c; other vN are vias at no path point)
5V_BUCK: C23.1 C24.1 C27.1 C28.1 C40.1 C41.1 C51.1 I1.3 J2.5 L1.2 R10.1 R12.2 R14.1 TP1.1 U4.3 | length 101.9
  Top Layer w0.254: TP1.1@74.676,68.834 74.676,71.916 I1.3@74.69,71.93 ; v1(75.184,108.458) 75.527,108.801 C28.1@76.327,108.801 ; C28.1@76.454,108.801 80.048,108.801 80.264,108.585 U4.3@80.264,108.371 ; C40.1@90.297,75.367 93.043,75.367 R14.1@94.877,73.533
  Top Layer w0.5: v1(49.53,88.519) 64.516,73.533 68.072,69.977 72.737,69.977 I1.3@74.69,71.93
  Bottom Layer w0.5: v1(49.53,88.519) 42.847,95.202 42.847,99.743 J2.5@41.577,101.013 43.077,102.513 43.077,105.583 45.952,108.458 v1(75.184,108.458) v1@75.311,108.458
AGND: C3.1 C5.1 C45.2 U1.25
BOOT: R9.2 U2.46 | length 9.9
  Top Layer w0.254: R9.2@72.263,105.575 72.263,105.918 77.216,105.918 77.597,105.537 78.24,104.894 U2.46@78.24,102.032 ; R9.2@72.517,105.575 R9.2@72.517,105.918
BOOT_6: C37.1 U3.1 | length 1.8
  Top Layer w0.382: C37.1@98.425,66.802 99.06,66.802 99.69,67.432 U3.1@99.69,67.742
CAN_N: R27.2 U4.6 X1.P$2 X2.P$2 | length 43.5
  Top Layer w0.102: 53.712,110.366 55.11,111.764 55.11,112.357 55.61,112.857 55.934,112.857 ccw(c56.848,112.774) 57.494,112.123 60.773,108.844 68.444,108.844 67.301,109.987 67.301,110.366 68.442,110.366 69.863,111.787 ccw(c70.183,112.647) 71.043,112.967 74.743,116.667 77.08,116.667 77.08,117.607 77.715,118.242 80.636,118.242 80.895,117.983 80.895,115.833 R27.2@80.904,115.824 80.255,115.824 80.133,115.702 80.128,115.702 80.128,114.138 80.264,114.002 U4.6@80.264,113.371
CAN_P: R27.1 U4.7 X1.P$3 X2.P$3 | length 35.2
  Top Layer w0.102: 56.712,110.366 55.313,111.764 55.313,112.273 55.694,112.654 55.734,112.654 ccw(c56.848,112.774) 57.481,111.849 60.689,108.641 68.576,108.641 70.301,110.366 70.301,111.533 ccw(c70.183,112.647) 71.272,112.909 74.827,116.464 77.714,116.464 R27.1@78.354,115.824 78.985,115.824 78.985,113.38 U4.7@78.994,113.371